# Altium PCB PaHoy.PcbDoc
Units mm, origin at the board's own origin, x right, y up, seen from the top; angles counter-clockwise.
Board outline 21 x 67 mm, 2 copper layers (Top Layer, Bottom Layer), stack 1.271 mm thick; 20 components, 41 nets, 147 pads, 102 vias.
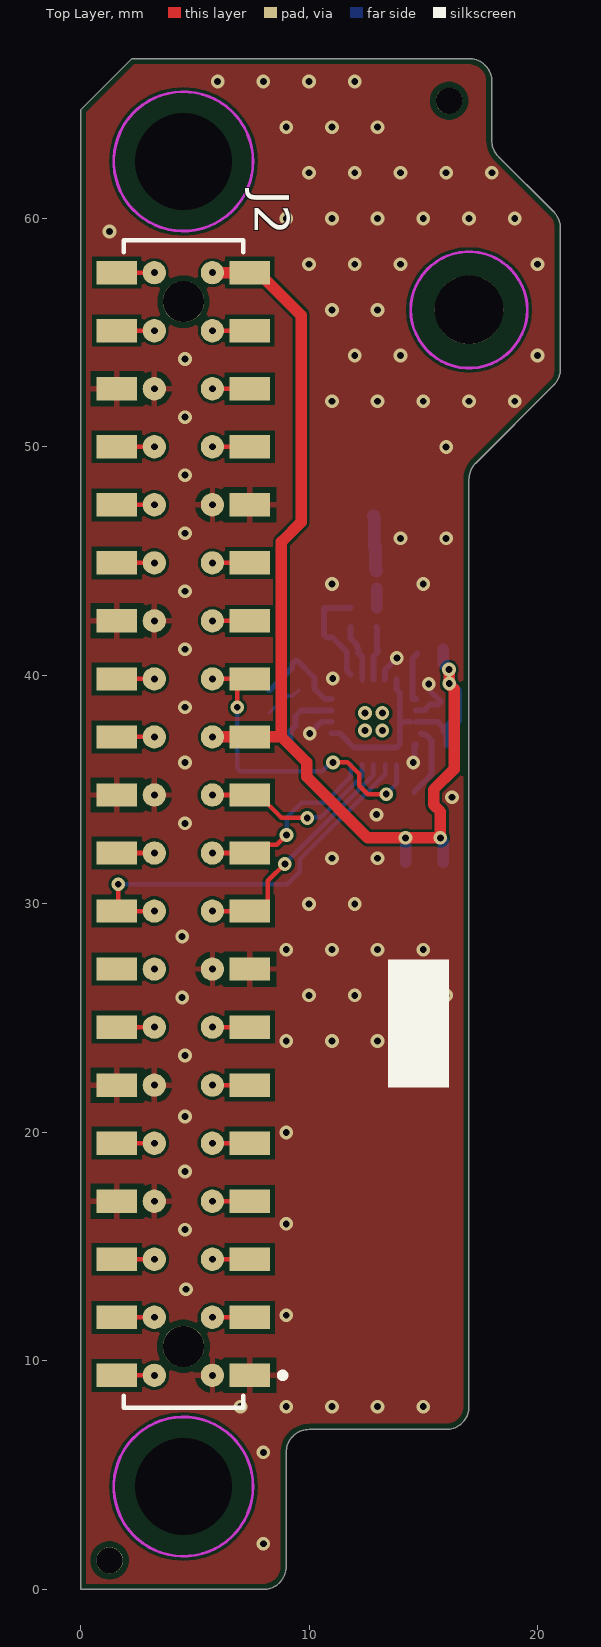
[diagram p0: Top Layer view]
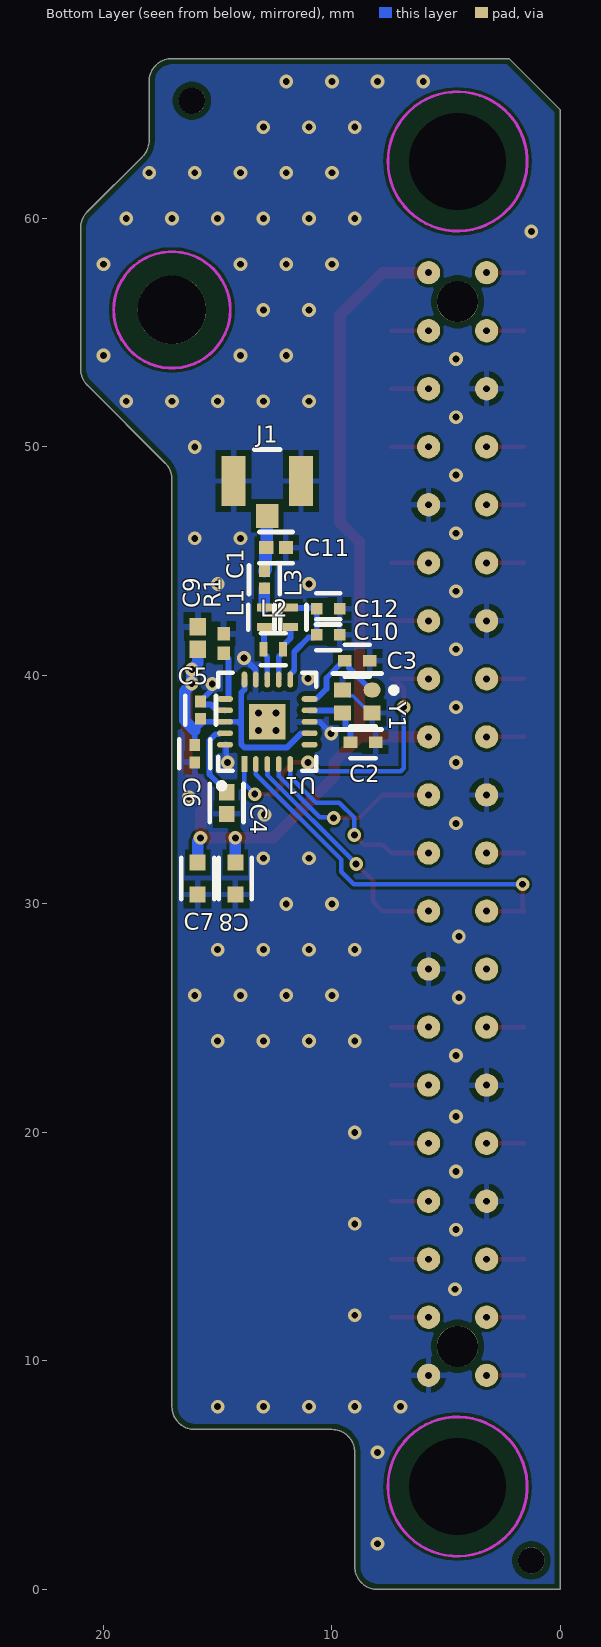
[diagram p1: Bottom Layer view, seen from below]
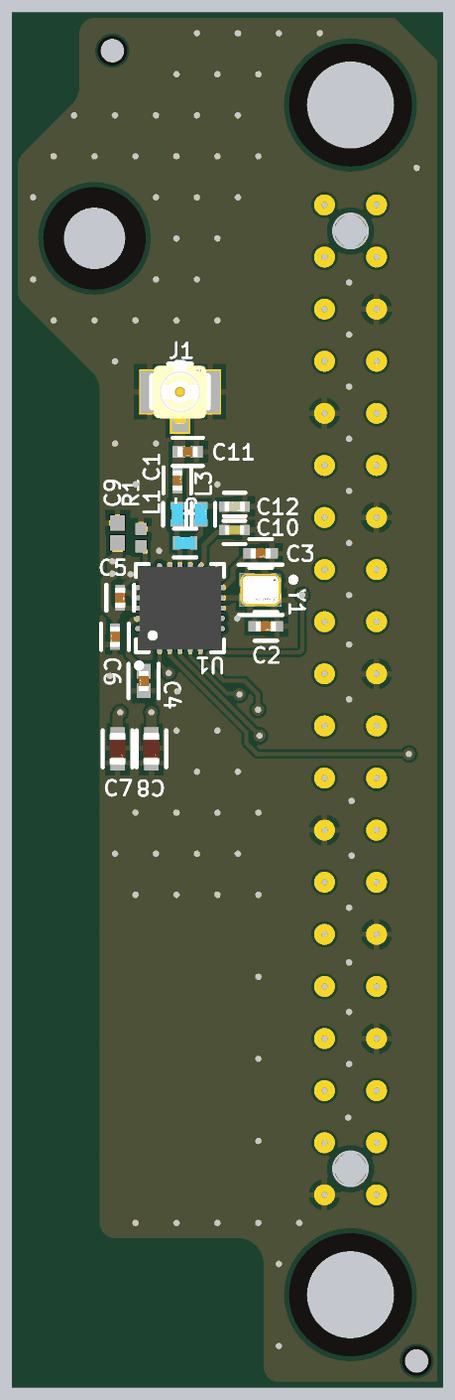
[diagram p2: 3D render of the assembled board from below, using the file's embedded part models]

## Layer stack, top to bottom
Top Solder: solder mask 0.0102, Solder Resist, Dk 3.5
Top Layer: signal copper 0.0356
Core: dielectric 1.2, FR-4, Dk 4.5
Bottom Layer: signal copper 0.0356
Bottom Solder: solder mask 0.0102, Solder Resist, Dk 3.5

## Board outline
0,0 0,64.75 2.25,67 17,67 cw(c17,66) 18,66 18,63.414 ccw(c19,63.414) 18.293,62.707 20.707,60.293 cw(c20,59.586) 21,59.586 21,53.414 cw(c20,53.414) 20.707,52.707 17.293,49.293 ccw(c18,48.586) 17,48.586 17,8 cw(c16,8) 16,7 10,7 ccw(c10,6) 9,6 9,1 cw(c8,1) 8,0

## Design rules (kind name [scope] priority, off if disabled: settings)
BoardOutlineClearance [All] p1: gap=0.254 ignorepadtopadclearanceinfootprint=FALSE except(0: Arc-SplitContinuation Track-SplitContinuation SMDPad-SplitContinuation THPad-SplitContinuation Via-SplitContinuation Fill-SplitContinuation Poly-SplitContinuation Region-SplitContinuation Text-SplitContinuation)
Clearance Clearance_nRF [TouchesRoom('nRF_EP_Room') vs IsTrack] p1: gap=0.127 ignorepadtopadclearanceinfootprint=TRUE
Clearance [All] p2: gap=0.127 ignorepadtopadclearanceinfootprint=TRUE except(0.2: Arc-SMDPad Track-SMDPad SMDPad-SMDPad SMDPad-Fill SMDPad-Poly SMDPad-Region SMDPad-Text; 0.254: Arc-Via Arc-Hole Track-Via Track-Hole SMDPad-Via SMDPad-Hole THPad-Hole Via-Hole Fill-Hole Poly-Hole Region-Hole Text-Hole; 0.33: Arc-THPad Track-THPad SMDPad-THPad THPad-THPad THPad-Via)
HoleSize [All] p1: absolutevalues=TRUE maxlimit=6.3 minlimit=0.3 maxpercent=80.000 minpercent=20.000
HoleToHoleClearance HoleToHoleClearance_Vias [All vs IsVia] p1: gap=0.254 allowstackedmicrovias=TRUE
HoleToHoleClearance [All] p2: gap=0.5 allowstackedmicrovias=TRUE
MinimumAnnularRing MinimumAnnularRing_Via [IsVia] p1: minimumring=0.15
MinimumAnnularRing [All] p2: minimumring=0.3
MinimumSolderMaskSliver [All] p1: minsoldermaskwidth=0.2
PolygonConnect [All] p1: thpad.connectstyle=Relief thpad.reliefconductorwidth=0.254 thpad.reliefentries=4 thpad.polygonreliefangle="90 Angle" thpad.airgapwidth=0.254 smdpad.connectstyle=Relief smdpad.reliefconductorwidth=0.254 smdpad.reliefentries=4 smdpad.polygonreliefangle="90 Angle" smdpad.airgapwidth=0.254 via.connectstyle=Direct via.reliefconductorwidth=0.254 via.reliefentries=4 via.polygonreliefangle="90 Angle" via.airgapwidth=0.254
RoomDefinition nRF_EP_Room [False vs False] p1: confinementstyle=ConfineIn formatcopy=TRUE lockcomponents=FALSE outline 12.065,38.735 13.589,38.735 13.589,37.211 12.065,37.211
RoutingVias [All] p1: holewidth=0.3 width=0.6 viastyle="Through Hole" minholewidth=0.3 minwidth=0.6 maxholewidth=0.711 maxwidth=1.27
SolderMaskExpansion SolderMaskExpansion_Via [IsVia] p1: expansion=0.102 istentingtop=TRUE
SolderMaskExpansion [All] p2: expansion=0.05 istentingtop=FALSE
Width Width_RF50 [InNetClass('50R')] p1: maxlimit=0.563 minlimit=0.563 preferedwidth=0.563 impedanceprofiledriven=TRUE impedanceprofileid={59E02BD8-90E1-4B98-8B05-B3230349E2B7} impedanceprofilevalue=50.000000 minimp=50.000000 maximp=50.000000 favimp=50.000000
Width [All] p2: maxlimit=10 minlimit=0.15 preferedwidth=0.254 minimp=50.000000 maximp=50.000000 favimp=50.000000
27 further rules are at their usual default settings.

## Classes and differential pairs
net class 50R: NetC1_2
component class Connector: J2

## Components (designator, comment, footprint, x,y, rotation, side; value= is the part's Value field where it differs from the comment)
C1 "GCM1555C1H1R5BA16D" FP-GCM155-0_05-IPC_C 12.954,44.196 r90 bottom
C2 "04025A220JAT2A" FP-0402-L_1_0_1-W_0_5_0_1-MFG 8.636,37.084 r180 bottom
C3 "04025A220JAT2A" FP-0402-L_1_0_1-W_0_5_0_1-MFG 8.89,40.64 r180 bottom
C4 "GCM155R71E333KA55D" FP-GCM155-0_05-IPC_A 14.605,34.417 r270 bottom
C5 "CL05B102KB5NNNC" FP-CL957-IPC_C 15.748,38.481 r90 bottom
C6 "CL05B103KB5NNNC" FP-CL165-IPC_C 16.002,36.576 r270 bottom
C7 "LMK107BJ106MALTD" FP-LMK107BJ106MALTD-MFG 15.875,31.115 r270 bottom
C8 "LMK107BJ106MALTD" FP-LMK107BJ106MALTD-MFG 14.224,31.115 r270 bottom
C9 "CL05B104KO5NNNC" CAPC1050X55X23ML05T13 15.875,41.638 r90 bottom value=100nF
C10 "CC0402KRX7R9BB222" FP-CC0402-MFG 10.16,41.783 r180 bottom value="2.2 nF"
C11 "GJM1555C1H1R0WB01D" FP-GJM155-0_05-IPC_B 12.446,45.593 r180 bottom
C12 "AC0402CRNPO9BN4R7" FP-AC0402-0_5-MFG 10.16,42.926 r180 bottom value="4.7 pF"
J1 "U.FL-R-SMT-1(10)" FP-U_FL-R-SMT-1_10-MFG 12.827,48.514 r0 bottom
J2 "M20-7812045" FP-M20-7812045-MFG 4.5,33.5 r90 top locked
L1 "LQW15AN3N9B00D" FP-LQW15AN_00-W0_6-0_1-MFG 12.954,42.545 r90 bottom
L2 "LQW15AN8N2G00D" FP-LQW15AN_00-W0_6-0_1-MFG 12.573,41.148 r0 bottom
L3 "LQW15AN2N7B00D" FP-LQW15AN_00-W0_6-0_1-MFG 11.811,42.545 r90 bottom
R1 "RC0402FR-0722KL" RESC1005X40X25NL05T10 14.732,41.402 r270 bottom value=22k
U1 "NRF24L01P-T" NRSC-QFN-20_L 12.827,37.973 r90 bottom
Y1 "X201616MPB4SC" FP-ABM11-MFG 8.89,38.862 r0 bottom

## Footprints (in the part's own frame and the unit in brackets; to place one, negate y for a bottom-side part, rotate by r counter-clockwise, add the part's x,y. Pads: shape width x height; smd on the part's side, far side on the other; paste and mask are expansions set on the pad)
CAPC1050X55X23ML05T13 [mm] "Chip Capacitor, 2-Leads, Body 1.05x0.55mm, IPC Low Density"
  rect 0.76x0.72 smd: 1(-0.49,0) 2(0.49,0)
  body extent -0.53,-0.28 0.53,0.27, height 0.55
FP-0402-L_1_0_1-W_0_5_0_1-MFG [mm]
  rect 0.6x0.5 smd paste+0 mask+0: 1(-0.55,0) 2(0.55,0)
  silkscreen extent -0.55,-0.7 0.55,0.7, body extent -0.5,-0.25 0.5,0.25, height 0.56
FP-ABM11-MFG [mm]
  oval 0.75x0.65 smd paste+0 mask+0: 1(-0.65,-0.5)
  rect 0.75x0.65 smd paste+0 mask+0: 2(0.65,-0.5) 3(0.65,0.5) 4(-0.65,0.5)
  silkscreen extent -1.72,-1.22 1.07,1.22, body extent -1,-0.8 1,0.8, height 0.59
FP-AC0402-0_5-MFG [mm]
  rect 0.5x0.5 smd paste+0 mask+0: 1(-0.5,0) 2(0.5,0)
  silkscreen extent -0.54,-0.69 0.53,0.67, body extent -0.5,-0.25 0.5,0.25, height 0.55
FP-CC0402-MFG [mm]
  rect 0.5x0.5 smd paste+0 mask+0: 1(-0.5,0) 2(0.5,0)
  silkscreen extent -0.53,-0.68 0.53,0.67, body extent -0.5,-0.25 0.5,0.25, height 0.55
FP-CL165-IPC_C [mm]
  rect 0.515x0.472 smd paste+0 mask+0: 1(-0.379,0) 2(0.379,0)
  silkscreen extent -0.64,-0.67 0.64,0.67, body extent -0.5,-0.25 0.5,0.25, height 0.55
FP-CL957-IPC_C [mm]
  rect 0.515x0.472 smd paste+0 mask+0: 1(-0.379,0) 2(0.379,0)
  silkscreen extent -0.64,-0.67 0.64,0.67, body extent -0.5,-0.25 0.5,0.25, height 0.55
FP-GCM155-0_05-IPC_A [mm]
  rect 0.715x0.672 smd paste+0 mask+0: 1(-0.479,0) 2(0.479,0)
  silkscreen extent -0.84,-0.74 0.84,0.74, body extent -0.5,-0.25 0.5,0.25, height 0.55
FP-GCM155-0_05-IPC_C [mm]
  rect 0.515x0.472 smd paste+0 mask+0: 1(-0.379,0) 2(0.379,0)
  silkscreen extent -0.64,-0.67 0.64,0.67, body extent -0.5,-0.25 0.5,0.25, height 0.55
FP-GJM155-0_05-IPC_B [mm]
  rect 0.615x0.572 smd paste+0 mask+0: 1(-0.429,0) 2(0.429,0)
  silkscreen extent -0.74,-0.69 0.74,0.69, body extent -0.5,-0.25 0.5,0.25, height 0.55
FP-LMK107BJ106MALTD-MFG [mm]
  rect 0.7x0.7 smd paste+0 mask+0: 1(-0.7,0) 2(0.7,0)
  silkscreen extent -0.9,-0.72 0.9,0.72, body extent -0.8,-0.4 0.8,0.4, height 0.9
FP-LQW15AN_00-W0_6-0_1-MFG [mm]
  rect 0.35x0.65 smd paste+0 mask+0: 1(-0.425,0) 2(0.425,0)
  silkscreen extent -0.55,-0.7 0.55,0.7, body extent -0.5,-0.3 0.5,0.3, height 0.6
FP-M20-7812045-MFG [mm]
  rect 1.02x1.78 smd paste+0 mask+0: 1(-24.13,-2.91) 2(-24.13,2.91) 3(-21.59,-2.91) 4(-21.59,2.91) 5(-19.05,-2.91) 6(-19.05,2.91) 7(-16.51,-2.91) 8(-16.51,2.91) 9(-13.97,-2.91) 10(-13.97,2.91) 11(-11.43,-2.91) 12(-11.43,2.91) 13(-8.89,-2.91) 14(-8.89,2.91) 15(-6.35,-2.91) 16(-6.35,2.91) 17(-3.81,-2.91) 18(-3.81,2.91) 19(-1.27,-2.91) 20(-1.27,2.91) 21(1.27,-2.91) 22(1.27,2.91) 23(3.81,-2.91) 24(3.81,2.91) 25(6.35,-2.91) 26(6.35,2.91) 27(8.89,-2.91) 28(8.89,2.91) 29(11.43,-2.91) 30(11.43,2.91) 31(13.97,-2.91) 32(13.97,2.91) 33(16.51,-2.91) 34(16.51,2.91) 35(19.05,-2.91) 36(19.05,2.91) 37(21.59,-2.91) 38(21.59,2.91) 39(24.13,-2.91) 40(24.13,2.91)
  round 1.02 hole 0.3 paste-0.51 mask+0: ""(-24.13,-1.27) ""(-24.13,1.27) ""(-21.59,-1.27) ""(-21.59,1.27) ""(-19.05,-1.27) ""(-19.05,1.27) ""(-16.51,-1.27) ""(-16.51,1.27) ""(-13.97,-1.27) ""(-13.97,1.27) ""(-11.43,-1.27) ""(-11.43,1.27) ""(-8.89,-1.27) ""(-8.89,1.27) ""(-6.35,-1.27) ""(-6.35,1.27) ""(-3.81,-1.27) ""(-3.81,1.27) ""(-1.27,-1.27) ""(-1.27,1.27) ""(1.27,-1.27) ""(1.27,1.27) ""(3.81,-1.27) ""(3.81,1.27) ""(6.35,-1.27) ""(6.35,1.27) ""(8.89,-1.27) ""(8.89,1.27) ""(11.43,-1.27) ""(11.43,1.27) ""(13.97,-1.27) ""(13.97,1.27) ""(16.51,-1.27) ""(16.51,1.27) ""(19.05,-1.27) ""(19.05,1.27) ""(21.59,-1.27) ""(21.59,1.27) ""(24.13,-1.27) ""(24.13,1.27)
  round 1.8 hole 1.8 unplated paste-1000 mask+0: ""(-22.86,0) ""(22.86,0)
  silkscreen extent -25.55,-4.47 25.55,2.62, body extent -25.65,-3.9 25.65,3.9, height 0.25
FP-U_FL-R-SMT-1_10-MFG [mm]
  rect 1x1.05 smd paste-1000 mask+0: 1(0,1.525)
  rect 1.05x2.2 smd paste-1000 mask+0: 2(-1.475,0) 3(1.475,0)
  silkscreen extent -0.58,-1.38 0.58,-1.38, body extent -1.5,-1.55 1.5,1.55, height 1.45
NRSC-QFN-20_L [mm] "QFN, 20-Leads, Body 4x4mm, Pitch 0.5mm, Thermal Pad 2.6x2.6mm, IPC High Density"
  rect 0.7x0.25 smd: 1(-1.85,1)
  oval 0.7x0.25 smd: 2(-1.85,0.5) 3(-1.85,0) 4(-1.85,-0.5) 5(-1.85,-1) 11(1.85,-1) 12(1.85,-0.5) 13(1.85,0) 14(1.85,0.5) 15(1.85,1)
  oval 0.25x0.7 smd: 6(-1,-1.85) 7(-0.5,-1.85) 8(0,-1.85) 9(0.5,-1.85) 10(1,-1.85) 16(1,1.85) 17(0.5,1.85) 18(0,1.85) 19(-0.5,1.85) 20(-1,1.85)
  rect 1.55x1.6 smd: 21(0,0)
  silkscreen extent -2.92,-2.15 2.15,2.15, body extent -2,-2 2,2, height 0.95
RESC1005X40X25NL05T10 [mm] "Chip Resistor, 2-Leads, Body 1.00x0.50mm, IPC Medium Density"
  rect 0.6x0.55 smd: 1(-0.425,0) 2(0.425,0)
  body extent -0.53,-0.27 0.53,0.28, height 0.4

## Part data
C1: library part CMP-06035-019024-1, "Ceramic Capacitor for Automotive 1.5pF ±0.1pF 50VDC C0G 0402 Paper T/R", Capacitance=1.5pF, Case Code (Imperial)=0402, Case Code (Metric)=1005, JLCPartNum=C126500, Max Operating Temperature=125°C, Min Operating Temperature=-55°C, Ratings=AEC-Q200, Voltage Rating=50V, Case/Package=0402, Mount="Surface Mount", Packaging="Tape and Reel"
C2 C3: library part CMP-2008-02613-2, "General Purpose Ceramic Capacitor, 0402, 22pF, 5%, C0G, 30ppm/°C, 50V", Capacitance=22pF, Case Code (Imperial)=0402, Case Code (Metric)=1005, Dielectric=C0G, JLCPartNum=C694268, Max Operating Temperature=125°C, Min Operating Temperature=-55°C, Package Quantity=1, Temperature Coefficient=30ppm/°C, Tolerance=5%, Voltage=50V, Case/Package=0402, Construction=Flat, Contact Plating=Tin, Depth=0.5mm, Height=0.5mm, Lead Free="Lead Free", Length=1mm, Mount="Surface Mount", Number of Pins=2, Packaging="Tape and Reel", Radiation Hardening=No, REACH SVHC="No SVHC", RoHS Compliant=Yes, Series=-, Termination=SMD/SMT, Thickness=0.022inch, Voltage Rating=50V, Voltage Rating (DC)=50V, Width=0.02inch
C4: library part CMP-2008-03719-2, "Ceramic Capacitor for Automotive 33nF ±10% 25VDC X7R 0402 Paper T/R", Capacitance=33nF, Case Code (Imperial)=0402, Case Code (Metric)=1005, Dielectric=X7R, JLCPartNum=C185046, Max Operating Temperature=125°C, Min Operating Temperature=-55°C, Package Quantity=10000, Ratings=AEC-Q200, Tolerance=10%, Voltage Rating=25V, Case/Package=0402, Depth=0.5mm, Height=0.5mm, Lead Free="Lead Free", Length=1mm, Mount="Surface Mount", Packaging="Tape and Reel", Radiation Hardening=No, REACH SVHC="No SVHC", Termination=SMD/SMT, Thickness=0.022inch, Voltage Rating (DC)=25V, Width=0.02inch
C5: library part CMP-13271-004091-1, "Cap Ceramic 1nF 50V X7R ±10% SMD 0402 +125°C Paper T/R", Capacitance=1nF, Case Code (Imperial)=0402, Case Code (Metric)=1005, Dielectric=X7R, JLCPartNum=C14442, Max Operating Temperature=125°C, Min Operating Temperature=-55°C, Package Quantity=1, Tolerance=10%, Voltage=50V, Case/Package=0402, Contact Plating=Tin, Depth=0.5mm, Height=0.5mm, Lead Free="Lead Free", Length=1mm, Material=Ceramic, Mount="Surface Mount", Packaging="Tape and Reel", Radiation Hardening=No, Thickness=0.022inch, Voltage Rating=50V, Voltage Rating (DC)=50V, Width=0.02inch
C6: library part CMP-13271-000387-1, "Cap Ceramic 10nF 50V X7R ±10% SMD 0402 +125°C Paper T/R", Capacitance=10nF, Case Code (Imperial)=0402, Case Code (Metric)=1005, Dielectric=X7R, JLCPartNum=C15195, Max Operating Temperature=125°C, Min Operating Temperature=-55°C, Package Quantity=1, Tolerance=10%, Voltage=50V, Case/Package=0402, Contact Plating=Tin, Depth=0.5mm, Height=0.5mm, Lead Free="Lead Free", Length=1mm, Material=Ceramic, Mount="Surface Mount", Packaging="Tape and Reel", Radiation Hardening=No, Thickness=0.022inch, Voltage Rating=50V, Voltage Rating (DC)=50V, Width=0.02inch
C7 C8: library part CMP-2000-05443-2, "CAP CER 10UF 10V X5R 0603", Capacitance=10uF, Case Code (Imperial)=0603, Case Code (Metric)=1608, Dielectric=X5R, JLCPartNum=C18800, Max Operating Temperature=85°C, Min Operating Temperature=-55°C, Package Quantity=4000, Resistor Type=Ceramic, Tolerance=20%, Voltage Rating=10V, Case/Package=0603, Construction=Flat, Height=0.8mm, Lead Free="Lead Free", Length=1.6mm, Mount="Surface Mount", Number of Pins=2, Packaging="Tape and Reel", REACH SVHC="No SVHC", RoHS Compliant=Yes, Series=M, Termination=SMD/SMT, Thickness=0.035inch, Voltage Rating (DC)=10V, Width=0.031inch
C9: library part CMP-2000-05439-1, "Chip Capacitor, 100 nF, +/- 10%, 16 V, -55 to 125 degC, 0402 (1005 Metric), RoHS, Tape and Reel", Capacitance=100000pF, Case Size/Dimension=0402, Dielectric=X7R, JLCPartNum=C1525, Manufacturer="Samsung Electro-Mechanics", Rated Voltage=16V, Tolerance (%)=±10%, Datasheet URL=https://datasheet.ciiva.com/29198/458718-da-01-en-vs-kondensator-0402-29198423.pdf, Datasheet Version=Nov-10, Manufacturer URL=http://www.samsungsem.com/global/index.jsp
C10: library part CMP-1034-01742-2, "CAP CER 2200PF 50V X7R 0402", Capacitance="2.2 nF", JLCPartNum=C106861, Manufacturer=YAGEO, Package=CC0402, Temperature="-55°C to +125°C", Temperature Characteristic=X7R, Temperature Coefficient=30ppm/°C, Temperature Range High=+125°C, Temperature Range Low=-55°C, Tolerance=0.1, Voltage Rating="50 V", Automotive=No, Automotive Grade=NA, Category=Cap, ComponentLink2Description=Datasheet, ComponentLink2URL=http://www.yageo.com/documents/recent/UPY-GP_NP0_16V-to-50V_16.pdf, Device Class L1="Passive Components", Device Class L2=Capacitors, Device Class L3="Ceramic Capacitors", Digikey Description="CAP CER 2200PF 50V X7R 0402", Footprint Url=http://www.yageo.com/exep/pages/download/literatures/UPY-C_GEN_24.pdf, Height=0.55mm, Ipc Land Pattern Name=CAPC10050X50, Lead Free=Yes, Manufacturer Part Number=CC0402KRX7R9BB222, Material=Ceramic, Mouser Description="Multilayer Ceramic Capacitors MLCC - SMD/SMT 2.2nF 50V X7R 10%", Octopart=https://octopart.com/cc0402krx7r9bb222-yageo-39467642, RoHS=TRUE
C11: library part CMP-2008-03760-2, "Multi-Layer Ceramic Capacitor 1pF C0G  ±0.05pF 0402 Paper T/R", Capacitance=1pF, Case Code (Imperial)=0402, Case Code (Metric)=1005, Dielectric=C0G, JLCPartNum=C72134, Max Operating Temperature=125°C, Min Operating Temperature=-55°C, Package Quantity=10000, Voltage=50V, Case/Package=0402, Depth=0.5mm, Height=0.5mm, Lead Free="Lead Free", Length=1mm, Mount="Surface Mount", Packaging="Tape and Reel", Radiation Hardening=No, Termination=SMD/SMT, Thickness=0.022inch, Voltage Rating=50V, Voltage Rating (DC)=50V, Width=0.5mm
C12: library part CMP-03422-000491-1, "CAP CER 4.7PF 50V NPO 0402", Capacitance="4.7 pF", JLCPartNum=C726112, Manufacturer=Yageo, Package=AC0402-0.5, Temperature="-55°C to +125°C", Temperature Characteristic=NPO, Temperature Coefficient=30ppm/°C, Temperature Range High=+125°C, Temperature Range Low=-55°C, Tolerance=0.0025, Voltage Rating="50 V", Automotive=Yes, Automotive Grade="Grade 1", Category=Cap, ComponentLink2Description=Datasheet, ComponentLink2URL=http://www.yageo.com/documents/recent/UPY-AC_NP0X7R_16V-to-630V_12.pdf, Device Class L1="Passive Components", Device Class L2=Capacitors, Device Class L3="Ceramic Capacitors", Digikey Description="CAP CER 4.7PF 50V NPO 0402", Footprint Url=http://www.yageo.com/exep/pages/download/literatures/UPY-C_GEN_24.pdf, Height=0.55mm, Ipc Land Pattern Name=CAPC10050X50, Lead Free=Yes, Manufacturer Part Number=AC0402CRNPO9BN4R7, Material=Ceramic, Mouser Description="Cap Ceramic 4.7pF 50V C0G 0.25pF Pad SMD 0402 125°C Automotive T/R", Octopart=https://octopart.com/ac0402crnpo9bn4r7-yageo-76907315, RoHS=TRUE
J1: library part CMP-2000-05152-3, "CONN U.FL RCPT STR 50 OHM SMD", Dielectric Material=Polymer, Frequency=6GHz, Housing Color=Beige, Insulation Resistance=500MR, JLCPartNum=C88373, Max Operating Temperature=90°C, Min Operating Temperature=-40°C, Package Quantity=2500, Body Material=Bronze, Body Plating=Silver, Connector Type=Coaxial, Contact Material=Brass, Contact Plating=Gold, Depth=3.1mm, Fastening Type=Snap, Gender=Male, Impedance=50R, Lead Free="Lead Free", Length=3mm, Max Frequency=6GHz, Mount="Surface Mount", Orientation=Straight, Packaging="Cut Tape", Radiation Hardening=No, REACH SVHC="No SVHC", Series=U.FL, Termination=Solder, Weight=0.001764oz, Wire/Cable Type=Coaxial
J2: library part CMP-15831-000026-1, "CONN RCPT 40POS 0.1 GOLD SMD", Current Rating=3A, Flammability Rating="UL94 V-0", Insulation Color=Black, Max Operating Temperature=105°C, Min Operating Temperature=-40°C, Connector Type=Receptacle, Contact Material=Bronze, Contact Plating=Gold, Contact Shape=Square, Fastening Type=Push, Insulation Material=Nylon, Mount="Surface Mount", Number of Positions=40, Number of Rows=2, Packaging=Rail/Tube, Termination=Solder
L1: library part CMP-06042-000827-1, "Wire Wound RF Inductor 3.9nH ±0.1nH 750mA 0.07Ω 0402 (1005)", Case Code (Imperial)=0402, Case Code (Metric)=1005, Current=750mA, DC Resistance (DCR)=70mR, Inductance=3.9nH, JLCPartNum=C98062, Max Operating Temperature=125°C, Min Operating Temperature=-55°C, Package Quantity=10000, Self Resonant Frequency=10GHz, Test Frequency=100MHz, Case/Package=0402, Core Material=Air, Current Rating=750mA, DC Current=750mA, Depth=0.7mm, Height=0.5mm, Lead Free="Lead Free", Length=1mm, Max DC Current=750mA, Military Standard=Not, Mount="Surface Mount", Number of Pins=2, Packaging="Tape and Reel", Radiation Hardening=No, REACH SVHC="No SVHC", Shielding=Unshielded, Termination=SMD/SMT, Weight=2.8E-05oz, Width=0.02inch
L2: library part CMP-2000-06598-2, "Wire Wound RF Inductor 8.2nH ±2% 540mA 0.14Ω 0402 (1005)", Case Code (Imperial)=0402, Case Code (Metric)=1005, Current Rating=540mA, DC Resistance (DCR)=140mR, Inductance=8.2nH, Inductance Tolerance=2%, JLCPartNum=C84404, Max Operating Temperature=125°C, Min Operating Temperature=-55°C, Package Quantity=10000, Self Resonant Frequency=5.5GHz, Test Frequency=100MHz, Case/Package=0402, Core Material=Air, DC Current=540mA, Depth=0.7mm, Height=0.5mm, Lead Free="Lead Free", Length=1mm, Max DC Current=540mA, Military Standard=Not, Mount="Surface Mount", Number of Pins=2, Packaging="Tape and Reel", Q Factor=25, Radiation Hardening=No, REACH SVHC="No SVHC", Shielding=Unshielded, Termination=SMD/SMT, Tolerance=2%, Weight=2.8E-05oz, Width=0.02inch
L3: library part CMP-06042-004544-1, "Wire Wound RF Inductor 2.7nH ±0.1nH 850mA 0.05Ω 0402 (1005)", Case Code (Imperial)=0402, Case Code (Metric)=1005, Current=750mA, Current Rating=850mA, DC Resistance (DCR)=50mR, Inductance=2.7nH, JLCPartNum=C91239, Max Operating Temperature=125°C, Min Operating Temperature=-55°C, Package Quantity=10000, Self Resonant Frequency=15GHz, Test Frequency=100MHz, Case/Package=0402, Core Material=Air, DC Current=850mA, Depth=0.7mm, Height=0.5mm, Lead Free="Lead Free", Length=1mm, Max DC Current=850mA, Military Standard=Not, Mount="Surface Mount", Packaging="Tape and Reel", Q Factor=20, Radiation Hardening=No, REACH SVHC="No SVHC", Shielding=Unshielded, Termination=SMD/SMT, Weight=2.8E-05oz, Width=0.02inch
R1: library part CMP-2002-07517-1, JLCPartNum=C82868, Manufacturer="Yageo / Phycomp", Part Number=RC0402FR-0722KL
U1: library part CMP-2000-06859-1, "Single Chip Transceiver, 2.4 GHz, 60 mW, 1.9 to 3.6 V, -40 to 85 degC, 20-Pin QFN, RoHS, Tray", Current - Receiving=12.6mA~13.5mA, Current - Transmitting=7mA~11.3mA, Frequency=2.4GHz, JLCPartNum=C1526140, Manufacturer="Nordic Semiconductor", Operating Temperature=-40°C~85°C, Package / Case=20-VFQFNExposedPad, Package Description="20-Pin Quad Flat No-lead Package, Body 4 x 4 mm, Pitch 0.5 mm", Package Reference=QFN20, Power - Output=0dBm, Standard Package=490, Voltage - Supply=1.9V~3.6V, Category=RF/IFandRFID, Data Rate (Max)=2Mbps, Datasheet URL=http://www.nordicsemi.com/eng/content/download/2726/34069/file/nRF24L01P_Product_Specification_1_0.pdf, Datasheet Version="Rev. 1.0, 09/2008", Design Resources=DevelopmentToolSelector, Family=RFTransceiverICs, For Use With=1490-1002-ND-KITEVALUATIONNRF24L01P1568-1295-ND-SPARKFUNTRANSCEIVERBREAKOUT-1568-1296-ND-SPARKFUNTRANSCEIVERBREAKOUT-1471-1410-ND-DEVBOARDNRFSCLICKNRF24L01P-MODULE-PCB-ND-KITEVALNRF24L01+PCBANTENNANRF24L01P-MODULE-SMA-ND-KITEVALNRF24L01+SMACONNNRF24L01P-UPGRADE-ND-UPGRADE2PCB/1SMANRF24L01103990038-ND-DEVDUINOSENSORNODEV1.3103990053-ND-DEVDUINOSENSORNODEV2(ATMEGA103990074-ND-DEVDUINOSENSORNODE106990026-ND-ENERGYMONITORSHIELDV2113990088-ND-WIRELESSGATESHIELD113990095-ND-DEVDUINOSENSORNODEV3(ATMEGA106030001-ND-ENERGYMONITORSHIELD1597-1361-ND-DEVDUINOSENSORNODEV2.2(ATMEG105990030-ND-RGBWSTRIPWIRELESSSHIELDV1.0, GPIO=-, Manufacturer URL=http://www.nordicsemi.com/eng/Products/, Memory Size=-, Modulation=GFSK, Mounting Technology=SurfaceMount, Online Catalog=nRF24L01+, Other Names=1490-1019, Packaging=Tray, Protocol=-, RF Family/Standard=GeneralISM>1GHZ, Sensitivity=-94dBm, Serial Interfaces=SPI, Series=-, Type=TxRxOnly
Y1: library part CMP-27762-009948-1, "Crystal 16MHz ±15ppm 15pF SMD-4 2mm x 1.6mm", Case/Package=SMD/SMT, ESR (Equivalent Series Resistance)=80R, Frequency=16MHz, Frequency Stability=15ppm, JLCPartNum=C1985805, Load Capacitance=15pF, Max Operating Temperature=70°C, Min Operating Temperature=-20°C, Operating Frequency="15 MHz", Package Quantity=1000, Frequency Tolerance=15ppm, Height=0.023inch, Lead Free="Lead Free", Length=0.079inch, Mount="Surface Mount", Number of Pins=4, Packaging="Tape and Reel", REACH SVHC="No SVHC", Series Resistance=80R, Termination=SMD/SMT, Tolerance=15ppm, Width=1.6mm

## Free pads (board coordinates)
  round 4 hole 4.25 unplated paste-2 mask+1: 1(4.5,4.5) 1(4.5,62.5)
  round 3 hole 3 unplated paste-1.5 mask+1: 1(17,56)
  round 1.152 hole 1.152 unplated paste-0.576 mask+0.148: 4(1.27,1.27) 4(16.129,65.151)

## Via types
v1: diameter 0.6, hole 0.3, Top Layer to Bottom Layer, tented both sides, 102 vias

## Nets (pads, with @x,y where several pads share a name; then routed paths per layer and width w, separated by ;. In a path a pad name is that pad's centre, name@x,y a point inside that pad or via, vN(x,y) a via of type N, cw(c..) or ccw(c..) an arc to the next point about the centre after c; other vN are vias at no path point)
3V3: C5.1 C6.1 C7.1 C8.1 C9.1 J2.23 J2.39 J2.@5.77,37.31 J2.@5.77,57.63 U1.7 U1.15 U1.18 | length 59
  Top Layer w0.5: J2.@5.77,37.31 J2.23 8.791,37.31 ; J2.@5.77,57.63 J2.39 7.79,57.63 9.652,55.768 9.652,46.708 8.791,45.847 8.791,37.31 ; v1@16.129,39.624 v1(16.129,40.259) ; v1(16.136,39.65) 16.156,39.631 16.156,39.597 16.346,39.407 16.346,35.898 15.452,35.004 15.452,34.338 15.748,34.042 v1(15.748,32.893) 15.501,32.893 v1(14.224,32.893) 12.573,32.893 9.906,35.56 9.906,36.195 8.791,37.31
  Bottom Layer w0.254: U1.7@11.295,37.473 U1.7 10.979,37.471 11.343,37.471 11.972,36.842 13.821,36.842 13.97,36.991 13.97,37.829 ; U1.15 13.827,39.386 13.97,39.243 13.97,37.829 ; 14.058,37.918 13.97,37.829 ; 14.058,37.971 U1.18@14.454,37.971 ; U1.18 15.621,37.973 16.002,37.592 C6.1
  Bottom Layer w0.5: C8.1 v1(14.224,32.893) ; v1(15.748,32.893) 15.748,32.866 15.875,32.739 C7.1 ; C9.1 15.875,40.54 16.129,40.286 v1(16.129,40.259) 16.133,40.255 v1@16.133,39.659 ; 16.002,37.592 16.446,38.036 16.446,39.313 16.136,39.623 v1(16.136,39.65)
CE: J2.25 J2.@5.77,39.85 U1.1 | length 14.8
  Top Layer w0.2: J2.@5.77,39.85 J2.25@7.268,39.85 ; v1(6.858,38.608) 6.858,39.44 J2.25@7.268,39.85 ; J2.25 J2.25@7.268,39.85 ; v1(11.049,36.195) 11.684,36.195 12.192,35.687 12.192,35.179 12.571,34.8 12.81,34.8 12.816,34.806 v1(13.379,34.806)
  Bottom Layer w0.2: v1(6.858,38.608) 6.858,35.941 6.985,35.814 10.581,35.814 10.962,36.195 v1(11.049,36.195) ; v1(13.379,34.806) 13.827,35.254 U1.1
GND: C2.2 C3.2 C4.2 C5.2 C6.2 C7.2 C8.2 C9.2 C10.2 C11.2 C12.2 J1.2 J1.3 J2.1 J2.8 J2.12 J2.15 J2.22 J2.28 J2.31 J2.36 J2.@3.23,16.99 J2.@3.23,22.07 J2.@3.23,34.77 J2.@3.23,42.39 J2.@3.23,52.55 J2.@5.77,9.37 J2.@5.77,27.15 J2.@5.77,47.47 R1.1 U1.8 U1.14 U1.17 U1.20 Y1.2 Y1.4 | length 7.1
  Bottom Layer w0.15: Y1.4@8.254,38.362 8.504,38.612 8.579,38.612 9.079,39.112 9.29,39.112 Y1.2
  Bottom Layer w0.254: v1(10.033,37.465) 10.539,37.971 10.975,37.971 U1.8 ; U1.14 13.329,39.825 13.329,40.253 v1(13.843,40.767) ; v1(14.563,36.195) 14.62,36.252 14.62,36.971 14.622,36.973 U1.20 ; U1.17 14.679,38.475 15.043,38.475 15.297,38.729 15.639,38.729 15.748,38.838 C5.2 15.748,38.881 15.306,39.323 15.306,39.558 v1(15.24,39.624)
  other v1: 8,2 8,6 7,8 9,8 11,8 13,8 15,8 9,12 4.616,13.137 4.572,15.748 9,16 4.572,18.288 9,20 4.572,20.701 4.572,23.368 9,24 11,24 13,24 15,24 4.445,25.908 10,26 12,26 14,26 16,26 9,28 11,28 13,28 15,28 4.445,28.575 10,30 12,30 11,32 13,32 4.572,33.528 12.954,33.909 16.256,34.671 4.572,36.195 4.572,38.608 11.039,39.868 4.572,41.148 4.572,43.688 11,44 15,44 14,46 16,46 4.572,46.228 4.572,48.768 16,50 4.572,51.308 11,52 13,52 15,52 17,52 19,52 4.572,53.848 12,54 14,54 20,54 11,56 13,56 10,58 12,58 14,58 20,58 1.27,59.436 9,60 11,60 13,60 15,60 17,60 19,60 10,62 12,62 14,62 16,62 18,62 9,64 11,64 13,64 6,66 8,66 10,66 12,66
MISO: J2.19 J2.@5.77,32.23 U1.5 | length 8.4
  Top Layer w0.2: J2.@5.77,32.23 J2.19 7.776,32.596 8.593,32.596 v1(9.017,33.02)
  Bottom Layer w0.2: v1(9.017,33.02) 9.017,33.782 9.671,34.436 10.697,34.436 11.827,35.566 U1.5
MOSI: J2.21 J2.@5.77,34.77 U1.4 | length 8.3
  Top Layer w0.2: J2.@5.77,34.77 J2.21 7.79,34.77 8.778,33.782 9.906,33.782 v1(9.924,33.764)
  Bottom Layer w0.2: v1(9.924,33.764) 9.961,33.801 10.524,33.801 12.317,35.594 12.317,36.113 U1.4
N2: J2.2 J2.@3.23,9.37 | length 1.6
  Top Layer w0.2: J2.2 J2.@3.23,9.37
N3: J2.3 J2.@5.77,11.91 | length 1.6
  Top Layer w0.2: J2.@5.77,11.91 J2.3
N4: J2.4 J2.@3.23,11.91 | length 1.6
  Top Layer w0.2: J2.4 J2.@3.23,11.91
N5: J2.5 J2.@5.77,14.45 | length 1.6
  Top Layer w0.2: J2.@5.77,14.45 J2.5
N6: J2.6 J2.@3.23,14.45 | length 1.6
  Top Layer w0.2: J2.6 J2.@3.23,14.45
N7: J2.7 J2.@5.77,16.99 | length 1.6
  Top Layer w0.2: J2.@5.77,16.99 J2.7
N9: J2.9 J2.@5.77,19.53 | length 1.6
  Top Layer w0.2: J2.@5.77,19.53 J2.9
N10: J2.10 J2.@3.23,19.53 | length 1.6
  Top Layer w0.2: J2.10 J2.@3.23,19.53
N11: J2.11 J2.@5.77,22.07 | length 1.6
  Top Layer w0.2: J2.@5.77,22.07 J2.11
N13: J2.13 J2.@5.77,24.61 | length 1.6
  Top Layer w0.2: J2.@5.77,24.61 J2.13
N14: J2.14 J2.@3.23,24.61 | length 1.6
  Top Layer w0.2: J2.14 J2.@3.23,24.61
N16: J2.16
N20: J2.20 J2.@3.23,32.23 | length 1.6
  Top Layer w0.2: J2.20 J2.@3.23,32.23
N24: J2.24 J2.@3.23,37.31 | length 1.6
  Top Layer w0.2: J2.24 J2.@3.23,37.31
N26: J2.26 J2.@3.23,39.85 | length 1.6
  Top Layer w0.2: J2.26 J2.@3.23,39.85
N27: J2.27 J2.@5.77,42.39 | length 1.6
  Top Layer w0.2: J2.@5.77,42.39 J2.27
N29: J2.29 J2.@5.77,44.93 | length 1.6
  Top Layer w0.2: J2.@5.77,44.93 J2.29
N30: J2.30 J2.@3.23,44.93 | length 1.6
  Top Layer w0.2: J2.30 J2.@3.23,44.93
N32: J2.32 J2.@3.23,47.47 | length 1.6
  Top Layer w0.2: J2.32 J2.@3.23,47.47
N33: J2.33 J2.@5.77,50.01 | length 1.6
  Top Layer w0.2: J2.@5.77,50.01 J2.33
N34: J2.34 J2.@3.23,50.01 | length 1.6
  Top Layer w0.2: J2.34 J2.@3.23,50.01
N35: J2.35 J2.@5.77,52.55 | length 1.6
  Top Layer w0.2: J2.@5.77,52.55 J2.35
N37: J2.37 J2.@5.77,55.09 | length 1.6
  Top Layer w0.2: J2.@5.77,55.09 J2.37
N38: J2.38 J2.@3.23,55.09 | length 1.6
  Top Layer w0.2: J2.38 J2.@3.23,55.09
N40: J2.40 J2.@3.23,57.63 | length 1.6
  Top Layer w0.2: J2.40 J2.@3.23,57.63
NCS: J2.18 J2.@3.23,29.69 U1.2 | length 17.3
  Top Layer w0.2: v1(1.651,30.861) 1.651,29.751 J2.18 J2.@3.23,29.69
  Bottom Layer w0.2: v1(1.651,30.861) 9.048,30.861 9.594,31.408 9.594,31.946 13.327,35.679 U1.2
NetC1_1: C1.1 L1.2 | length 0.9
  Bottom Layer w0.254: L1.2 L1.2@12.983,42.999
  Bottom Layer w0.5: L1.2 C1.1
NetC1_2: C1.2 C11.1 J1.1 | length 2.5
  Bottom Layer w0.563: J1.1 12.851,46.965 12.851,45.598 12.855,45.593 C11.1 12.896,45.593 12.901,45.588 12.901,44.628 C1.2
NetC4_1: C4.1 U1.19 | length 3.2
  Bottom Layer w0.254: C4.1 14.605,34.917 15.354,35.666 15.354,37.16 15.089,37.425 14.946,37.425 U1.19@14.9,37.471
NetL1_1: L1.1 L2.2 U1.13 | length 2.4
  Bottom Layer w0.254: U1.13 12.827,40.827 12.998,40.998 L2.2 12.976,41.17 12.976,42.098 L1.1
NetL2_1: L2.1 L3.1 U1.12 | length 2.4
  Bottom Layer w0.254: L3.1 11.811,41.635 12.1,41.346 12.1,41.219 L2.1@12.159,41.159 ; L2.1@12.148,40.998 12.327,40.819 U1.12
NetR1_2: R1.2 U1.16 | length 2.2
  Bottom Layer w0.254: U1.16 14.526,38.973 14.524,38.975 14.524,40.744 14.732,40.952 R1.2
SCK: J2.17 J2.@5.77,29.69 U1.3 | length 10.5
  Top Layer w0.2: J2.@5.77,29.69 J2.17 7.79,29.69 8.2,30.1 8.2,31.012 v1(8.94,31.752)
  Bottom Layer w0.2: v1(8.94,31.752) 8.94,31.755 12.817,35.632 12.817,36.113 U1.3
VDD_PA: C10.1 C12.1 L3.2 U1.11 | length 4.7
  Bottom Layer w0.254: L3.2 11.789,42.948 10.682,42.948 C12.1 10.66,41.906 C10.1 10.783,41.66 11.027,41.66 11.646,41.041 11.646,40.225 U1.11@11.825,40.046
XC1: C3.1 U1.10 Y1.1 | length 4.3
  Bottom Layer w0.254: Y1.1 8.29,39.362 9.267,40.339 9.267,40.517 9.39,40.64 9.49,40.64 10.242,39.888 10.242,39.415 10.684,38.973 U1.10
XC2: C2.1 U1.9 Y1.3 | length 2.9
  Bottom Layer w0.254: C2.1 9.186,37.581 9.41,37.805 9.41,38.232 9.649,38.471 10.975,38.471 U1.9
pads on no net: J2.@3.23,27.15 J2.@4.5,10.64 J2.@4.5,56.36 U1.6 U1.21
copper on no net:
  other v1: 12.446,37.592 13.208,37.592 12.446,38.354 13.208,38.354

## Polygon pours and split planes (outlines as drawn)
GND on Bottom Layer "GND_L02_P000" (solid, remove dead copper, pour order 0): 0,67.183 17.78,67.183 18.796,66.167 18.669,66.04 18.669,62.738 21.59,59.817 21.59,52.959 17.272,48.641 17.272,7.493 16.51,6.731 10.033,6.731 9.525,6.223 9.525,0.889 8.636,0 0,0
GND on Top Layer "GND_L01_P001" (solid, remove dead copper, pour order 1): 0,65.659 2.032,67.691 19.05,67.691 21.717,65.024 21.717,53.213 17.145,48.641 17.399,48.387 17.399,0 0,0

## Keep-outs
Top Layer:
  circle w0.127: c17,56 r2.55
  circle w0.127: c4.5,4.5 r3.05
  circle w0.127: c4.5,62.5 r3.05
Bottom Layer:
  circle w0.127: c17,56 r2.55
  circle w0.127: c4.5,62.5 r3.05
  circle w0.127: c4.5,4.5 r3.05

## Silkscreen, mask and mechanical layers (free items; w line width, h text height)
Top Overlay:
  rectangle: 13.462,21.971 16.129,27.559
Top Solder:
  text "by DM6JM / PaHoy V1" at 16.256,10.287 h1.52 r90
Mechanical 1:
  circle w0.013: c17,56 r1.5
  circle w0.013: c4.5,62.5 r2.125
  circle w0.013: c4.5,4.5 r2.125
  lines w0.013: 0,0 1,0 ; 0,0 0,1 0,64.75 2.25,67 17,67 cw(c17,66) 18,66 18,63.414 ccw(c19,63.414) 18.293,62.707 20.707,60.293 cw(c20,59.586) 21,59.586 21,53.414 cw(c20,53.414) 20.707,52.707 17.293,49.293 ccw(c18,48.586) 17,48.586 17,8 cw(c16,8) 16,7 10,7 ccw(c10,6) 9,6 9,1 cw(c8,1) 8,0 ; 0,0 1,0 ; 1,0 8,0 ; 1,0 8,0
Fab Notes:
  text "JLCJLCJLCJLC" at 15.09,20.805 h0.85 r90
Mechanical 15:
  lines w0.013: 4.5,4.5 4.5,33.5